# Altium PCB PCB1.PcbDoc
Units mm, origin at the board's own origin, x right, y up, seen from the top; angles counter-clockwise.
Board outline 55 x 55 mm, 2 copper layers (Top Layer, Bottom Layer); 18 components, 24 nets, 126 pads, 30 vias.
Unrouted connection lines stored in the file: 1.
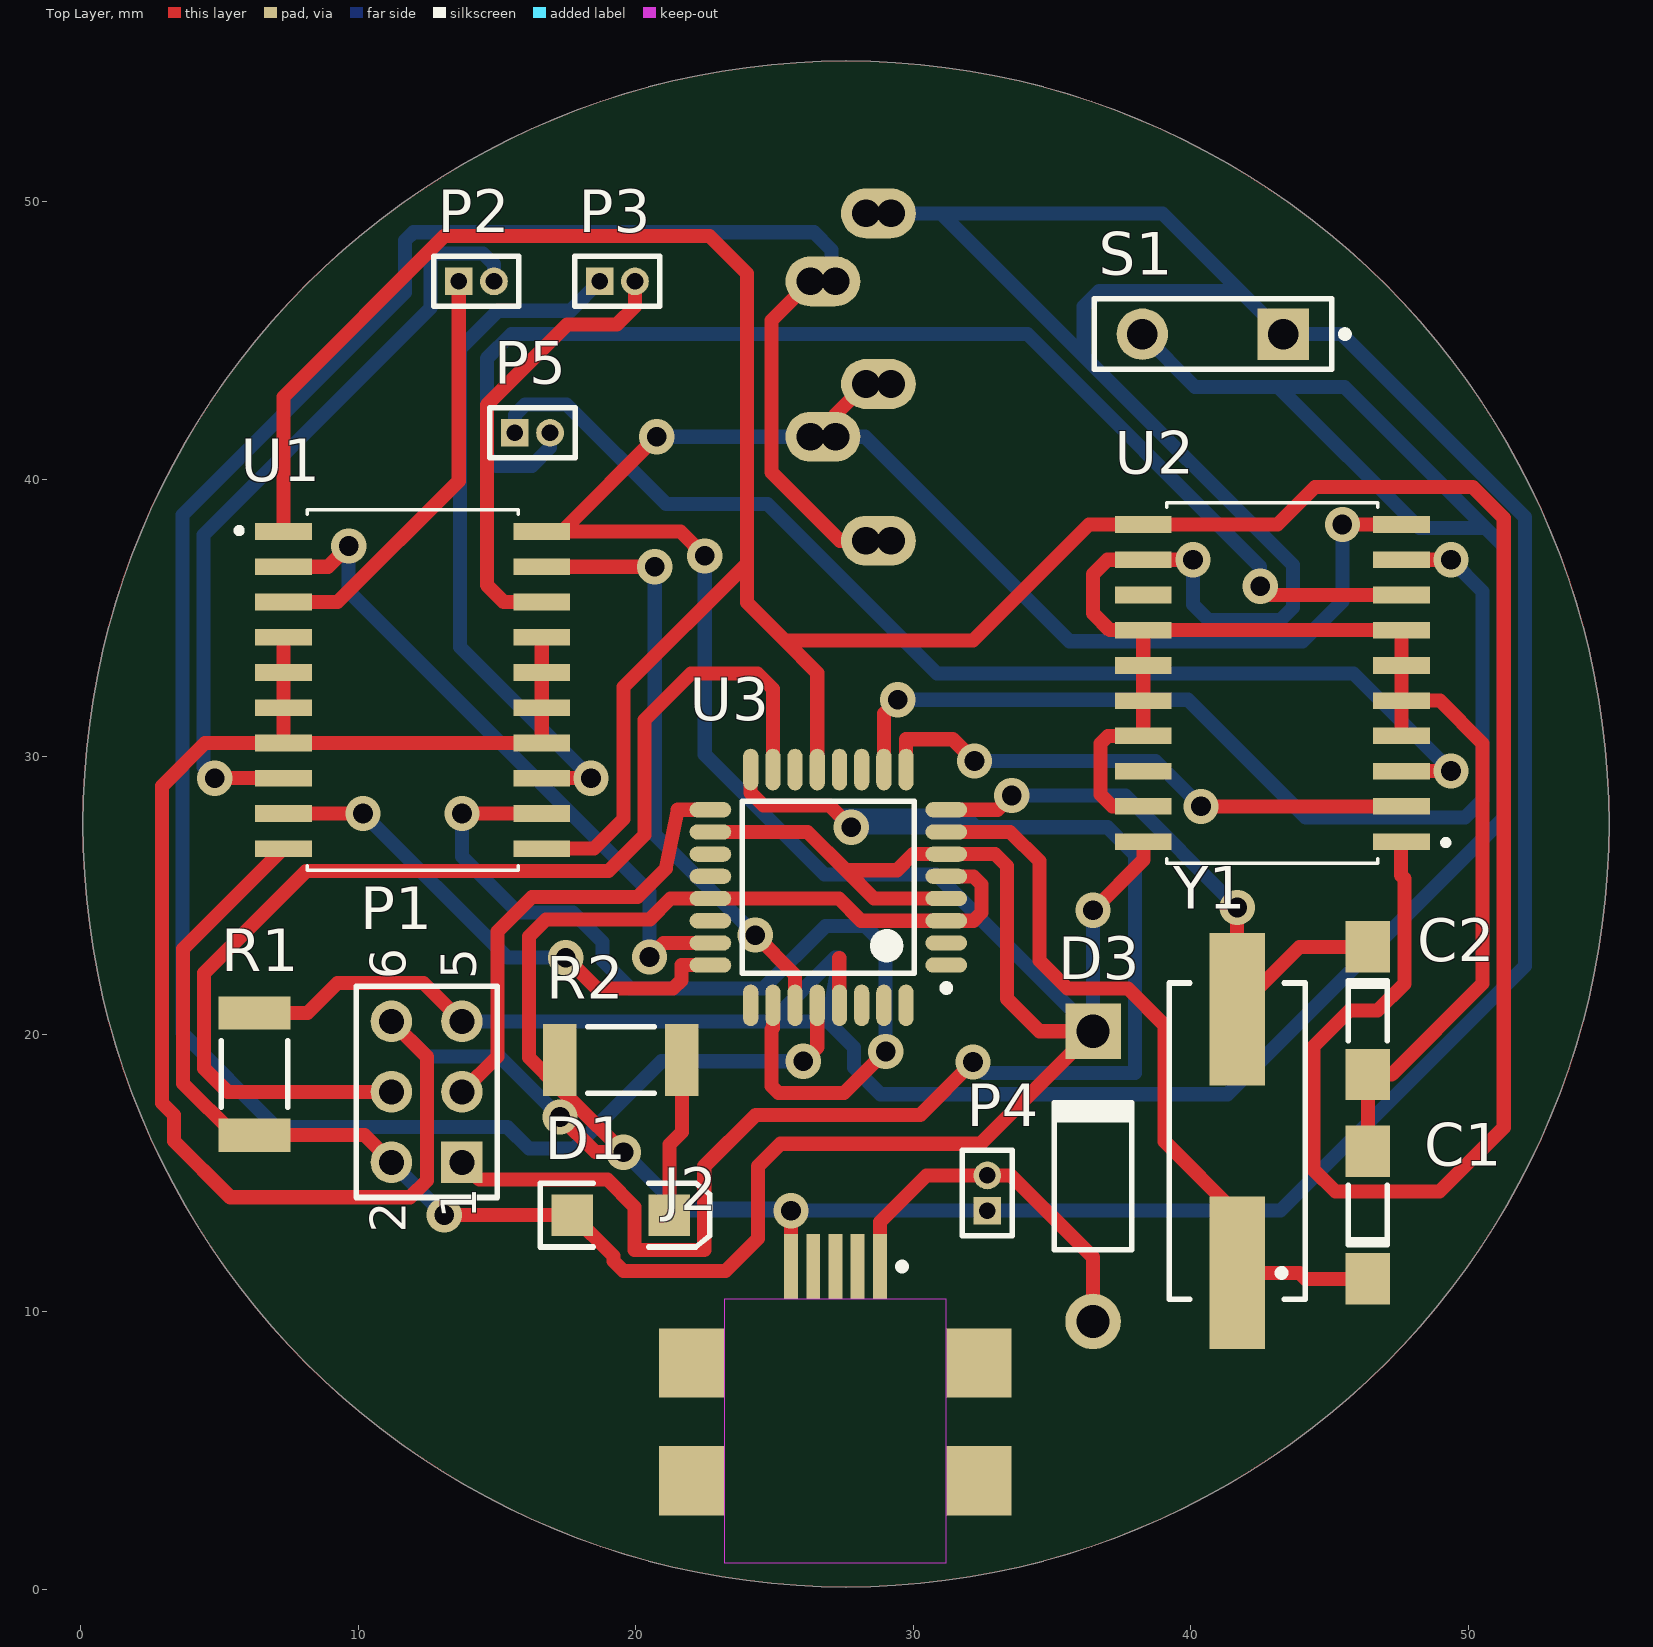
[diagram p0: Top Layer view]
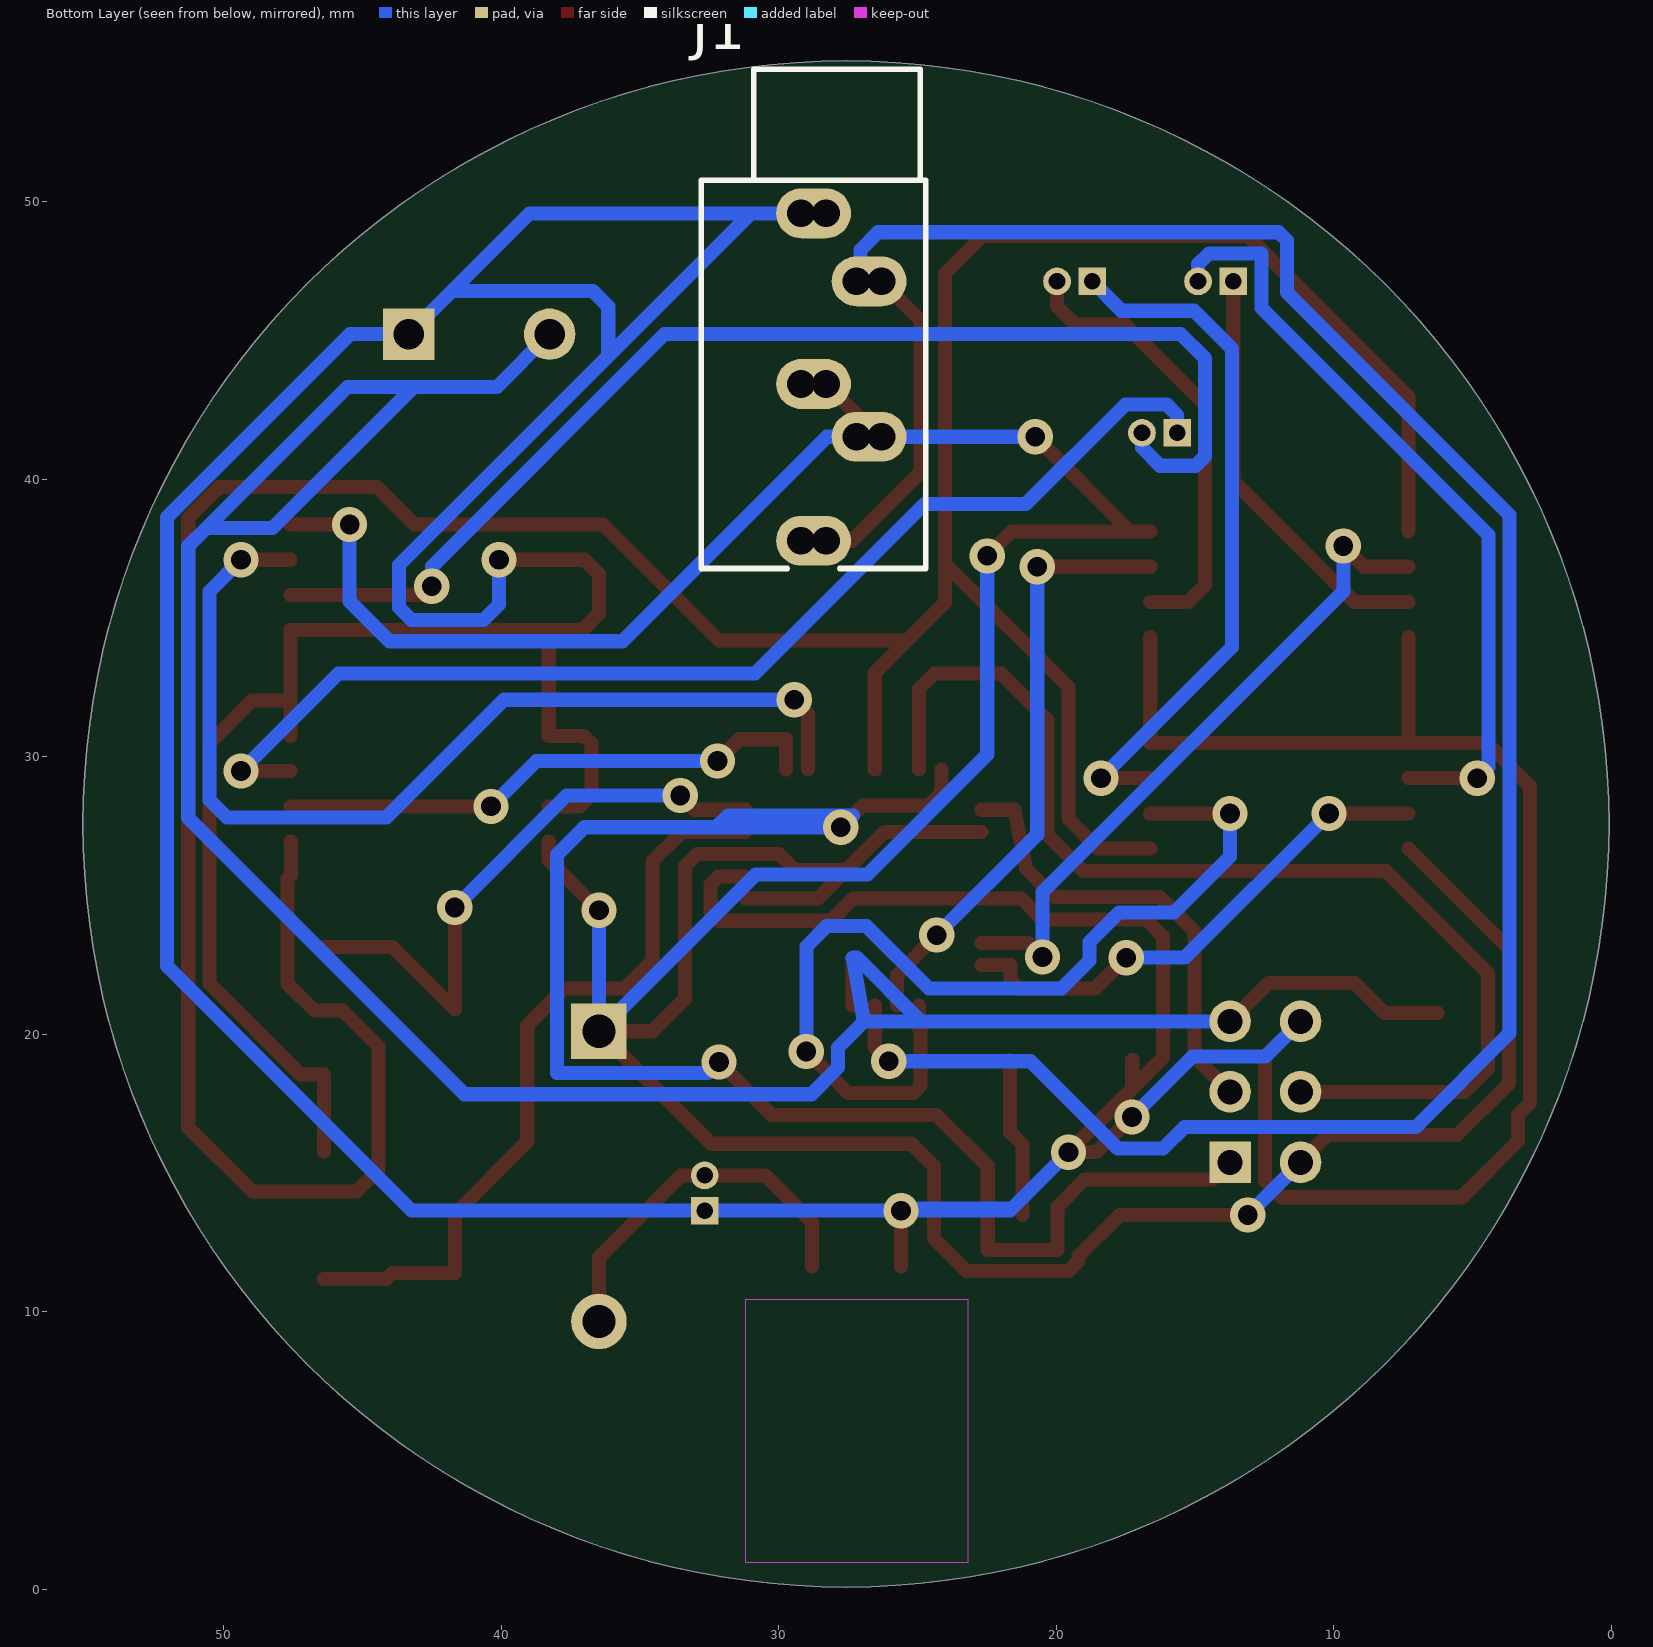
[diagram p1: Bottom Layer view, seen from below]

## Layer stack, top to bottom
Top Solder: solder mask 0.0102, Solder Resist, Dk 3.5
Top Layer: signal copper 0.0356
Dielectric 1: dielectric 0.32, FR-4, Dk 4.8
Bottom Layer: signal copper 0.0356
Bottom Solder: solder mask 0.0102, Solder Resist, Dk 3.5

## Board outline
0.076,27.576 ccw(c27.576,27.576) 27.576,0.076 ccw(c27.576,27.576) 55.076,27.576 ccw(c27.576,27.576) 27.576,55.076 ccw(c27.576,27.576)

## Design rules (kind name [scope] priority, off if disabled: settings)
Clearance [All] p1: gap=0.254 ignorepadtopadclearanceinfootprint=FALSE except(0: Arc-Hole Track-Hole SMDPad-Hole THPad-Hole Via-Hole Fill-Hole Poly-Hole Region-Hole Text-Hole)
MatchedLengths MatchLengths_U3_Passives_U1,U2 [InxSignalClass('xSignals_U3_Passives_U1,U2_MatchLengthsClass')] p1: tolerance=2.54 checknetsindiffpair=FALSE checkdiffpairvsdiffpair=TRUE checkxsignals=TRUE checkothers=TRUE
MatchedLengths MatchLengths_xSignals_U3_Passives [InxSignalClass('xSignals_U3_Passives_MatchLengthsClass')] p2: tolerance=2.54 checknetsindiffpair=FALSE checkdiffpairvsdiffpair=TRUE checkxsignals=TRUE checkothers=TRUE
MatchedLengths MatchLengths_xSignals_U3_U1,U2 [InxSignalClass('xSignals_U3_U1,U2_MatchLengthsClass')] p3: tolerance=2.54 checknetsindiffpair=FALSE checkdiffpairvsdiffpair=TRUE checkxsignals=TRUE checkothers=TRUE
PolygonConnect [All] p1: connectstyle=Relief reliefconductorwidth=0.254 reliefentries=4 polygonreliefangle="90 Angle" airgapwidth=0.254
RoutingVias [All] p1: holewidth=0.711 width=1.27 viastyle="Through Hole" minholewidth=0.711 minwidth=1.27 maxholewidth=0.711 maxwidth=1.27
SolderMaskExpansion [All] p1: expansion=0.102
Width [All] p1: maxlimit=0.762 minlimit=0.254 preferedwidth=0.508 minimp=50.000000 maximp=50.000000 favimp=50.000000
30 further rules are at their usual default settings.

## Components (designator, comment, footprint, x,y, rotation, side; value= is the part's Value field where it differs from the comment)
C1 "194D225X0015C2" C 46.385,13.481 r90 top value=2.2uF
C2 "" C 46.385,20.847 r270 top value=2.2uF
D1 "LED2" 3.2X1.6X1.1 19.461,13.481 r0 top
D3 "Diode 1N4007" DO-41 36.479,14.876 r90 top
J1 "Phonejack Stereo SW" ST-3150-5N 27.895,54.784 r180 bottom
J2 "0481900001" 481900001 27.195,7.764 r270 top
P1 "isp" HDR2X3 13.733,15.384 r90 top
P2 "MHDR1X2" MHDR1X2 13.619,47.134 r0 top
P3 "MHDR1X2" MHDR1X2 18.699,47.134 r0 top
P4 "Bat" MHDR1X2 32.669,13.641 r90 top
P5 "MHDR1X2" MHDR1X2 15.64,41.675 r0 top
R1 "" 12Z-2010 6.253,18.561 r90 top value=10k
R2 "330" 12Z-2010 19.461,19.069 r180 top value=1K
S1 "SW-PB" SPST-2 40.797,45.231 r180 top
U1 "L293DD" *SOIC127P1032X265-20N 11.955,32.402 r0 top
U2 "L293DD" *SOIC127P1032X265-20N 42.943,32.656 r180 top
U3 "Atmega328p1" TQFP80P900X900X120-32N 26.941,25.29 r180 top
Y1 "HC49/4H_SMX" HC49/4H_SMX 41.673,16.146 r90 top

## Footprints (in the part's own frame and the unit in brackets; to place one, negate y for a bottom-side part, rotate by r counter-clockwise, add the part's x,y. Pads: shape width x height; smd on the part's side, far side on the other; paste and mask are expansions set on the pad)
3.2X1.6X1.1 [mm] "SMT LED; 2 Flat Leads"
  rect 1.5x1.5 smd: 1(-1.75,0) 2(1.75,0)
  silkscreen extent -2.9,-1.15 3.2,1.15
12Z-2010 [mm] "Chip Resistor, Body 5.0x2.5mm, IPC High Density"
  rect 1.2x2.6 smd: 1(-2.2,0) 2(2.2,0)
  silkscreen extent -1.2,-1.2 1.2,1.2, body extent -2.58,-1.33 2.58,1.33, height 0.9
481900001 [mm] "Connector; USB Mini-B, Sinking Type, SM; 5 Position; Right Angle"
  rect 2.35x0.5 smd: 1(-3.862,1.6) 2(-3.862,0.8) 3(-3.862,0) 4(-3.862,-0.8) 5(-3.862,-1.6)
  rect 2.5x2.35 smd: MH1(-0.388,-5.175) MH2(3.863,-5.175) MH3(3.863,5.175) MH4(-0.388,5.175)
  Keep-Out Layer region: -2.687,-4 6.813,-4 6.813,4 -2.687,4
  silkscreen extent -3.99,2.28 -3.74,2.53, body extent -1.8,-3.84 6.8,3.86, height 0.35
*SOIC127P1032X265-20N [mm]
  rect 2.05x0.6 smd: 1(-4.655,5.715) 2(-4.655,4.445) 3(-4.655,3.175) 4(-4.655,1.905) 5(-4.655,0.635) 6(-4.655,-0.635) 7(-4.655,-1.905) 8(-4.655,-3.175) 9(-4.655,-4.445) 10(-4.655,-5.715) 11(4.655,-5.715) 12(4.655,-4.445) 13(4.655,-3.175) 14(4.655,-1.905) 15(4.655,-0.635) 16(4.655,0.635) 17(4.655,1.905) 18(4.655,3.175) 19(4.655,4.445) 20(4.655,5.715)
  silkscreen extent -6.35,-6.5 3.8,6.5
C [mm] "Chip Capacitor; Body 5.08 x 1.27 mm (LxW typ)"
  rect 1.85x1.6 smd: 1(-2.3,0) 2(2.3,0)
  silkscreen extent -1.07,-0.7 1.07,0.7
DO-41 [mm] "Diode, Axial; Body 5.2 x 2.7 mm (LxDia. max), Lead Dia. 0.86 mm (max)"
  round 2 hole 1.2: 1(-5.23,0)
  rect 2x2 hole 1.2: 2(5.23,0)
  silkscreen extent -2.65,-1.4 2.75,1.4
HC49/4H_SMX [mm] "Surface Mount Quartz Crystal; Body 13.4 (inc. leads) x 4.9 mm (LxW max)"
  rect 5.5x2 smd: 1(-4.75,0) 2(4.75,0)
  silkscreen extent -5.7,-2.45 5.7,2.45
HDR2X3 [mm] "Connector; Header; 3x2 Position"
  rect 1.5x1.5 hole 0.9: 1(0,0)
  round 1.5 hole 0.9: 2(0,2.54) 3(2.54,0) 4(2.54,2.54) 5(5.08,0) 6(5.08,2.54)
  silkscreen extent -1.27,-1.27 6.35,3.81
MHDR1X2 [mm] "Connector; Header; 2 Position"
  rect 1x1 hole 0.6: 1(0,0)
  round 1 hole 0.6: 2(1.27,0)
  silkscreen extent -0.9,-0.9 2.17,0.9
SPST-2 [mm] "Switch; 2 Leads"
  rect 1.85x1.85 hole 1.1: 1(-2.54,0)
  round 1.85 hole 1.1: 2(2.54,0)
  silkscreen extent -4.89,-1.27 4.28,1.27
ST-3150-5N [mm] "Connector; Stereo Jack, 3.5mm, 5 Position"
  oval 2.7x1.8 all layers, no hole: 1(-0.85,-5.2) 2(1.15,-7.65) 3(-0.85,-11.35) 4(1.15,-13.25) 5(-0.85,-17)
  round 1.2 hole 1: 1A(-1.3,-5.2) 1B(-0.4,-5.2) 2A(0.7,-7.65) 2B(1.6,-7.65) 3A(-1.3,-11.35) 3B(-0.4,-11.35) 4A(0.7,-13.25) 4B(1.6,-13.25) 5A(-1.3,-17) 5B(-0.4,-17)
  silkscreen extent -4.9,-18 3.2,0
TQFP80P900X900X120-32N [mm] "TQFP, 32-Leads, Body 7.00x7.00mm, Pitch 0.80mm, IPC Medium Density"
  oval 1.5x0.55 smd: 1(-4.25,2.8) 2(-4.25,2) 3(-4.25,1.2) 4(-4.25,0.4) 5(-4.25,-0.4) 6(-4.25,-1.2) 7(-4.25,-2) 8(-4.25,-2.8) 17(4.25,-2.8) 18(4.25,-2) 19(4.25,-1.2) 20(4.25,-0.4) 21(4.25,0.4) 22(4.25,1.2) 23(4.25,2) 24(4.25,2.8)
  oval 0.55x1.5 smd: 9(-2.8,-4.25) 10(-2,-4.25) 11(-1.2,-4.25) 12(-0.4,-4.25) 13(0.4,-4.25) 14(1.2,-4.25) 15(2,-4.25) 16(2.8,-4.25) 25(2.8,4.25) 26(2,4.25) 27(1.2,4.25) 28(0.4,4.25) 29(-0.4,4.25) 30(-1.2,4.25) 31(-2,4.25) 32(-2.8,4.25)
  silkscreen extent -4.38,-3.1 3.1,3.75, body extent -3.5,-3.5 3.5,3.5, height 1.2

## Part data
C1: "Midget Conformal Coated Solid Tantalum Chip Capacitor: 2.2uF, 20% Tolerance, 15 WVDC @ +85°C, Surge = 20V", ComponentLink1Description="Manufacturer Link", ComponentLink1URL=http://www.vishay.com/, ComponentLink2Description=Datasheet, ComponentLink2URL=http://www.vishay.com/docs/40000/194d.pdf, DatasheetDocument=05-Jul-2002, Note="See Data Sheet for full range of components", PackageReference=C, Published=19-Mar-2004, Publisher="Altium Limited"
C2: library part 194D225X0015C2, "Midget Conformal Coated Solid Tantalum Chip Capacitor: 2.2uF, 20% Tolerance, 15 WVDC @ +85°C, Surge = 20V", ComponentLink1Description="Manufacturer Link", ComponentLink1URL=http://www.vishay.com/, ComponentLink2Description=Datasheet, ComponentLink2URL=http://www.vishay.com/docs/40000/194d.pdf, DatasheetDocument=05-Jul-2002, Note="See Data Sheet for full range of components", PackageReference=C, Published=19-Mar-2004, Publisher="Altium Limited"
D1: "Typical RED, GREEN, YELLOW, AMBER GaAs LED", LatestRevisionDate=17-Jul-2002, LatestRevisionNote="Re-released for DXP Platform.", PackageDescription="SM LED; 2 Flat Leads", PackageReference=3.2X1.6X1.1, PackageVersion=Feb-2002, Published=8-Jun-2000, Publisher="Altium Limited"
D3: "1 Amp General Purpose Rectifier", Code_JEDEC=DO-204-AL, ComponentLink1Description="Manufacturer Link", ComponentLink1URL=http://www.fairchildsemi.com/, ComponentLink2Description=Datasheet, ComponentLink2URL=http://www.fairchildsemi.com/ds/1N%2F1N4001.pdf, DatasheetVersion=1998, LatestRevisionDate=17-Jul-2002, LatestRevisionNote="Re-released for DXP Platform.", PackageDescription="Diode, Axial; Body 5.2 x 2.7 mm (LxDia. max), Lead Dia. 0.86 mm (max)", PackageReference=DO-41, PackageVersion=Aug-1999, Published=8-Jun-2000, Publisher="Altium Limited"
J1: "3-Conductor Jack with 2 break contacts (normals) and 2 auxiliary make contacts", ComponentLink1Description="Manufacturer Link", ComponentLink1URL=http://domino.kycon.com/internet/Products.html, DatasheetDocument=07-Mar-2000, LatestRevisionDate=17-Dec-2003, LatestRevisionNote="PCB Footprint replaced.", Published=5-Jan-2004, Publisher="Altium Limited"
J2: "USB On-The-Go (OTG) Mini-B Receptacle, Right Angle, SMT, 0.80mm (.031\") Pitch, Solder Tabs with Back Cover, Recessed Type", ComponentLink1Description="Manufacturer Link", ComponentLink1URL=http://www.molex.com/, ComponentLink2Description=Datasheet, ComponentLink2URL=http://www.molex.com/cmc_upload/0/000/895/958/SD-48190-001RevA.pdf, DatasheetVersion="revA, May-2004", PackageDescription="USB Mini-B, Sinking Type, SM; 5 Position; Right Angle, Body 11.45 x 11.8 x 3.9 mm (LxWxH)", PackageReference=481900001, PackageVersion=May-2004, PCB_Layout="Complies with Manufacturer's Recommendation.", Published=21-Sep-2007, Publisher="Altium Limited"
P1: library part "Header 3X2", "Header, 3-Pin, Dual row", LatestRevisionDate=17-Jul-2002, LatestRevisionNote="Re-released for DXP Platform.", Publisher="Altium Limited"
P2 P3 P5: "Header, 2-Pin", LatestRevisionDate=17-Jul-2002, LatestRevisionNote="Re-released for DXP Platform.", Publisher="Altium Limited"
P4: library part MHDR1X2, "Header, 2-Pin", LatestRevisionDate=17-Jul-2002, LatestRevisionNote="Re-released for DXP Platform.", Publisher="Altium Limited"
R1 R2: library part Res3, "Resistor", LatestRevisionDate=29-May-2009, LatestRevisionNote="IPC-7351 Footprint Added.", PackageDescription="Chip Resistor", PackageReference=J1-0603, Published=8-Jun-2000, Publisher="Altium Limited"
S1: "Switch", LatestRevisionDate=17-Jul-2002, LatestRevisionNote="Re-released for DXP Platform.", PackageDescription="Switch; 2 Leads", PackageReference=SPST-2, Published=24-Mar-1999, Publisher="Altium Limited"
U1 U2: "L293DD Series Push - Pull Quad Channel Driver with Diodes - SOIC-20", Package="SOIC-20 STMicroelectronics", Availability=Unavailable, MF=STMicroelectronics, MP=L293DD, Price=None, SnapEDA_Link=https://www.snapeda.com/parts/L293DD/STMicroelectronics/view-part/?ref=snap
U3: "AVR"
Y1: "Surface Mount Quartz Crystal", PackageDocument=18-Oct-1999, ComponentLink1Description="Manufacturer Link", ComponentLink1URL=http://www.cmac.com/mt/, ComponentLink2Description=Datasheet, ComponentLink2URL=http://www.cmac.com/mt/databook/crystals/smd/hc49_4h_smx.pdf, DatasheetDocument=18-Oct-1999, Note="PCB layout complies with manufacturer's recommendation.", PackageReference=HC49/4H_SMX, Published=17-Jul-2002, Publisher="Altium Limited"

## Via types
v1: diameter 1.27, hole 0.711, Top Layer to Bottom Layer, 30 vias

## Nets (pads, with @x,y where several pads share a name; then routed paths per layer and width w, separated by ;. In a path a pad name is that pad's centre, name@x,y a point inside that pad or via, vN(x,y) a via of type N, cw(c..) or ccw(c..) an arc to the next point about the centre after c; other vN are vias at no path point)
Enable: U1.1 U1.11 U2.1 U2.11 U3.13 | length 130.5
  Top Layer w0.508: U1.1 7.3,42.972 13.097,48.768 22.657,48.768 24.003,47.422 24.003,36.957 ; U1.11 18.489,26.687 19.558,27.756 19.558,32.512 24.003,36.957 ; U3.13 26.541,33.022 25.375,34.188 ; U2.1 47.574,26.941 47.574,25.73 47.701,25.603 47.701,21.819 46.736,20.853 45.72,20.853 44.425,19.558 44.425,15.113 45.212,14.326 48.971,14.326 51.283,16.637 51.283,38.608 50.165,39.726 44.484,39.726 43.129,38.371 U2.11 36.339,38.371 32.156,34.188 25.375,34.188 ; 24.003,36.957 24.003,35.56 25.375,34.188
GND: C1.2 C2.2 J1.1 J1.1A J1.1B J2.5 P1.6 P4.1 R2.2 S1.1 U1.4 U1.5 U1.6 U1.7 U1.14 U1.15 U1.16 U1.17 U2.4 U2.5 U2.6 U2.7 U2.12 U2.14 U2.15 U2.16 U2.17 U2.19 U3.3 U3.5 U3.21 | length 271.3
  Top Layer w0.508: U1.4 U1.5 U1.6 U1.7 ; P1.6 12.471,19.186 12.471,14.732 11.862,14.122 5.385,14.122 3.353,16.154 3.353,17.084 2.921,17.516 2.921,28.939 4.48,30.497 U1.7 ; U1.17 U1.16 U1.15 U1.14 U1.7 ; R2.2 R2.2@17.261,18.045 ; v1(17.272,17.018) 18.542,15.748 v1(19.558,15.748) 17.78,17.526 R2.2@17.261,18.045 ; v1@25.52,13.716 v1(25.595,13.641) J2.5 ; U3.5 32.171,25.69 32.461,25.4 32.461,24.384 32.167,24.09 U3.3 28.118,24.09 27.318,24.89 U3.21 21.257,24.89 20.505,24.138 16.764,24.138 16.151,23.525 16.151,19.155 R2.2@17.261,18.045 ; U2.19 37.182,28.211 36.754,28.64 36.754,30.48 37.025,30.751 U2.17 U2.16 U2.15 U2.14 ; v1(40.081,37.101) U2.12 37,37.101 36.474,36.576 36.474,35.171 37.084,34.561 U2.14 ; C1.2 C2.2 47.244,18.547 50.521,21.823 50.521,30.48 48.979,32.021 U2.5 ; U2.4 U2.5 ; U2.14 U2.7 U2.6 U2.5
  Bottom Layer w0.508: P1.6 12.455,19.202 15.088,19.202 v1(17.272,17.018) ; v1(19.558,15.748) 21.59,13.716 ; J1.1B J1.1 J1.1A 31.01,49.584 ; v1(40.081,37.101) 40.081,35.484 40.64,34.925 43.231,34.925 43.688,35.382 43.688,36.906 36.144,44.45 ; 21.59,13.716 21.665,13.641 v1(25.595,13.641) ; 21.59,13.716 25.52,13.716 v1(25.595,13.641) ; v1(25.595,13.641) P4.1 43.232,13.641 52.045,22.454 52.045,38.625 ; 31.01,49.584 38.984,49.584 41.781,46.787 ; 31.01,49.584 36.144,44.45 ; 36.144,44.45 36.144,46.228 36.703,46.787 41.781,46.787 ; 41.781,46.787 S1.1 45.439,45.231 ; 45.439,45.231 52.045,38.625 ; 45.439,45.231 45.447,45.231 52.045,38.633 52.045,38.625
IN1: U1.2 U3.23 | length 24.4
  Top Layer w0.508: U1.2 8.907,36.847 v1(9.652,37.592) ; v1(20.498,22.784) 21.004,23.29 U3.23
  Bottom Layer w0.508: v1(9.652,37.592) 9.652,35.966 20.498,25.121 v1(20.498,22.784)
IN2: U1.9 U3.24 | length 18.7
  Top Layer w0.508: U1.9 v1(10.168,27.957) ; v1(17.475,22.758) 18.593,21.641 21.336,21.641 21.641,21.946 21.641,22.49 U3.24
  Bottom Layer w0.508: v1@10.16,27.965 v1(10.168,27.957) 15.367,22.758 v1(17.475,22.758)
IN3: U1.12 U3.26 | length 34.9
  Top Layer w0.508: v1(13.733,27.957) U1.12 ; U3.26 24.941,20.217 24.892,20.168 24.892,18.136 25.146,17.882 27.508,17.882 v1(29.007,19.38)
  Bottom Layer w0.508: v1(13.733,27.957) 13.733,26.399 15.748,24.384 17.736,24.384 18.796,23.324 18.796,22.657 19.812,21.641 24.584,21.641 26.844,23.901 28.27,23.901 29.007,23.165 v1(29.007,19.38)
IN4: U1.19 U3.27 | length 22
  Top Layer w0.508: U1.19 v1(20.684,36.847) ; v1(24.308,23.571) 25.741,22.138 U3.27
  Bottom Layer w0.508: v1(20.684,36.847) 20.684,27.195 v1(24.308,23.571)
IN5: U2.2 U3.9 | length 20
  Top Layer w0.508: U3.9 29.741,30.632 31.422,30.632 v1(32.209,29.845) ; v1(40.369,28.211) U2.2
  Bottom Layer w0.508: v1(32.209,29.845) 38.735,29.845 v1(40.369,28.211)
IN6: U2.9 U3.10 | length 36.7
  Top Layer w0.508: U3.10 28.941,31.557 v1(29.439,32.055) ; U2.9 v1(49.378,37.101)
  Bottom Layer w0.508: v1(29.439,32.055) 39.903,32.055 44.145,27.813 49.886,27.813 50.521,28.448 50.521,35.958 v1(49.378,37.101)
MISO: P1.1 U3.16 | length 60.4
  Top Layer w0.508: P1.1 14.36,14.757 18.974,14.757 19.953,13.778 19.953,12.223 22.469,12.223 22.469,15.24 24.323,17.094 30.251,17.094 v1(32.156,18.999) ; U3.16 24.141,28.702 24.598,28.245 26.975,28.245 v1(27.762,27.457)
  Bottom Layer w0.508: v1(32.156,18.999) 32.557,18.598 37.998,18.598 37.998,26.467 37.008,27.457 32.251,27.457 ; 32.251,27.457 v1(27.762,27.457) 27.33,27.889 31.819,27.889 32.251,27.457
MOSI: P1.4 U3.15 | length 41
  Top Layer w0.508: P1.4 5.291,17.924 4.445,18.771 4.445,22.199 8.125,25.879 19.021,25.879 20.32,27.178 20.32,31.318 21.996,32.995 24.384,32.995 24.941,32.437 U3.15
NetD1_2: D1.2 R2.1 | length 5.8
  Top Layer w0.508: D1.2 21.211,16.027 21.661,16.477 R2.1
NetP3_1: P3.1 U1.13 | length 25.3
  Top Layer w0.508: U1.13 v1(18.39,29.227)
  Bottom Layer w0.508: v1(18.39,29.227) 13.665,33.952 13.665,44.704 15.037,46.076 17.64,46.076 P3.1
NetP3_2: P3.2 U1.18 | length 16.4
  Top Layer w0.508: U1.18 15.24,35.577 14.63,36.187 14.63,42.672 17.531,45.572 19.313,45.572 19.969,46.228 P3.2
NetP5_1: P5.1 U2.3 | length 41.8
  Top Layer w0.508: U2.3 49.369,29.481 v1(49.378,29.489)
  Bottom Layer w0.508: P5.1 15.64,42.323 16.015,42.697 17.509,42.697 21.096,39.11 24.746,39.11 30.861,32.995 45.872,32.995 v1(49.378,29.489)
NetP5_2: P5.2 U2.8 | length 44.4
  Top Layer w0.508: v1(42.502,36.146) 42.817,35.831 U2.8
  Bottom Layer w0.508: P5.2 16.91,41.142 16.256,40.488 14.986,40.488 14.63,40.843 14.63,44.348 15.519,45.237 34.112,45.237 42.502,36.847 v1(42.502,36.146)
op1: P2.1 U1.3 | length 15.3
  Top Layer w0.508: U1.3 9.254,35.577 13.619,39.942 P2.1
op2: P2.2 U1.8 | length 28
  Top Layer w0.508: v1(4.826,29.227) U1.8
  Bottom Layer w0.508: v1(4.826,29.227) 4.418,29.635 4.418,37.998 12.598,46.179 12.598,48.142 14.499,48.142 14.889,47.752 P2.2
out: D3.1 J2.1 P4.2 | length 13.5
  Top Layer w0.508: J2.1 28.795,13.226 30.48,14.911 P4.2 33.528,14.911 36.479,11.96 D3.1
RST: P1.5 R1.2 S1.2 U3.29 | length 94.7
  Top Layer w0.508: R1.2 8.162,20.761 9.246,21.844 12.353,21.844 P1.5 ; 27.333,22.743 27.333,21.048 U3.29
  Bottom Layer w0.508: P1.5 24.884,20.464 ; 27.318,22.758 27.178,22.758 24.884,20.464 ; 27.333,22.743 26.924,20.464 ; S1.2 40.155,43.332 43.155,43.332 ; 24.884,20.464 26.924,20.464 ; 26.924,20.464 27.864,19.524 27.864,18.796 28.824,17.836 41.331,17.836 51.283,27.788 51.283,37.592 50.63,38.244 ; 43.155,43.332 48.243,38.244 50.63,38.244 ; 43.155,43.332 45.542,43.332 50.63,38.244
SCK: P1.3 U3.17 | length 16.7
  Top Layer w0.508: P1.3 15.011,19.202 15.011,23.698 16.256,24.943 20.057,24.943 21.082,25.968 21.512,28.09 U3.17
Sense: J1.2 J1.2A J1.2B J1.5 J1.5A J1.5B U3.28 | length 91.2
  Top Layer w0.508: v1(26.035,19.025) 26.541,19.531 U3.28 ; J1.2 J1.2B 24.887,45.726 24.887,40.253 27.356,37.784 J1.5B J1.5
  Bottom Layer w0.508: v1(26.035,19.025) 20.93,19.025 17.78,15.875 16.154,15.875 15.367,16.662 7.036,16.662 3.656,20.042 3.656,38.708 11.684,46.736 11.684,48.607 11.982,48.904 26.416,48.904 27.051,48.269 J1.2@27.051,47.278 ; J1.2B J1.2 J1.2@27.051,47.134 ; J1.5B J1.5 J1.5A ; J1.2@27.051,47.134 J1.2@27.051,47.278 ; J1.2@27.051,47.134 J1.2A J1.2@27.051,47.278
VCC: D1.1 D3.2 J1.3 J1.3A J1.3B J1.4 J1.4A J1.4B P1.2 R1.1 U1.10 U1.20 U2.10 U2.20 U3.4 U3.6 U3.18 | length 156.2
  Top Layer w0.508: U1.10 3.683,23.07 3.683,18.227 5.549,16.361 R1.1 10.217,16.361 P1.2 ; v1(13.097,13.481) D1.1 19.191,12.001 19.191,11.828 19.558,11.461 23.231,11.461 24.409,12.639 24.409,15.24 25.222,16.053 32.426,16.053 D3.2 34.544,20.106 33.373,21.277 33.373,26.063 32.946,26.49 U3.6 29.993,26.49 29.411,25.908 27.57,25.908 ; U1.20 U1.20@17.335,38.117 ; v1(20.752,41.534) U1.20@17.335,38.117 ; v1(22.484,37.24) 21.607,38.117 U1.20@17.335,38.117 ; U3.18 26.187,27.29 27.57,25.908 ; J1.4 J1.4A 27.195,42.334 J1.3B J1.3 ; U3.4 28.587,24.89 27.57,25.908 ; v1(36.479,24.465) 38.303,26.289 38.303,26.941 U2.20 ; v1(45.466,38.371) U2.10
  Bottom Layer w0.508: P1.2 v1(13.097,13.481) ; v1(20.752,41.534) 23.712,41.534 J1.4B J1.4 J1.4A 28.265,41.534 35.636,34.163 44.026,34.163 45.466,35.603 v1(45.466,38.371) ; v1(22.484,37.24) 22.484,36.944 22.484,30.079 26.808,25.756 30.83,25.756 D3.2 v1(36.479,24.465) ; J1.3B J1.3 J1.3A
x1: C1.1 U3.7 Y1.1 | length 27.7
  Top Layer w0.508: U3.7 33.492,27.29 34.544,26.238 34.544,22.657 35.56,21.641 37.744,21.641 39.065,20.32 39.065,16.129 41.673,13.521 Y1.1 43.917,11.396 44.132,11.181 C1.1
x2: C2.1 U3.8 Y1.2 | length 21.7
  Top Layer w0.508: U3.8 33.043,28.09 v1(33.553,28.6) ; v1(41.673,24.57) Y1.2 43.924,23.147 C2.1
  Bottom Layer w0.508: v1(33.553,28.6) 37.643,28.6 v1(41.673,24.57)
pads on no net: J2.2 J2.3 J2.4 J2.MH1 J2.MH2 J2.MH3 J2.MH4 U2.13 U2.18 U3.1 U3.2 U3.11 U3.12 U3.14 U3.19 U3.20 U3.22 U3.25 U3.30 U3.31 U3.32

## Polygon pours and split planes (outlines as drawn)
no net on Top Layer (none, pour order 24): 27.576,0.076 cw(c27.576,27.576) 0.076,27.576 cw(c27.576,27.576) 27.576,55.076 cw(c27.576,27.576) 55.076,27.576 cw(c27.576,27.576)
no net on Top Layer "Top Layer-No Net" (solid, pour order 2): 27.178,27.29
no net on Top Layer "Top Layer-No Net 1" (solid, pour order 0): 27.356,55.118
no net on Bottom Layer (none, pour order 22): 27.576,0.076 cw(c27.576,27.576) 0.076,27.576 cw(c27.576,27.576) 27.576,55.076 cw(c27.576,27.576) 55.076,27.576 cw(c27.576,27.576)

## Silkscreen, mask and mechanical layers (free items; w line width, h text height)
Mechanical 1:
  circle w0.152: c27.576,27.576 r27.5

## Text inside footprints (layer, text, board x,y; h text height)
P1: Top Overlay "6" at 11.701,21.988 h1.27 r90; Top Overlay "5" at 14.241,21.988 h1.27 r90; Top Overlay "2" at 11.701,12.844 h1.27 r90; Top Overlay "1" at 14.241,13.352 h1.27 r90